# EAGLE board Motor-Controllers (EAGLE 8.5.0)
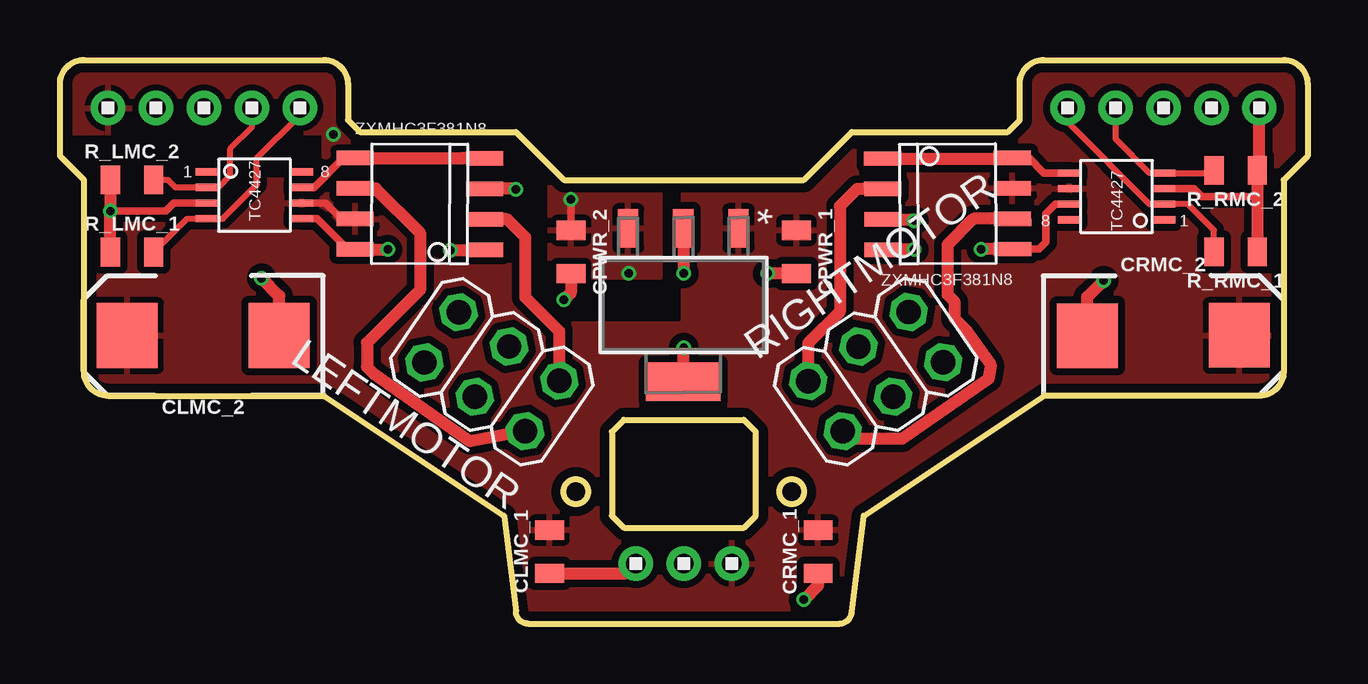
[diagram p0: board, top side]
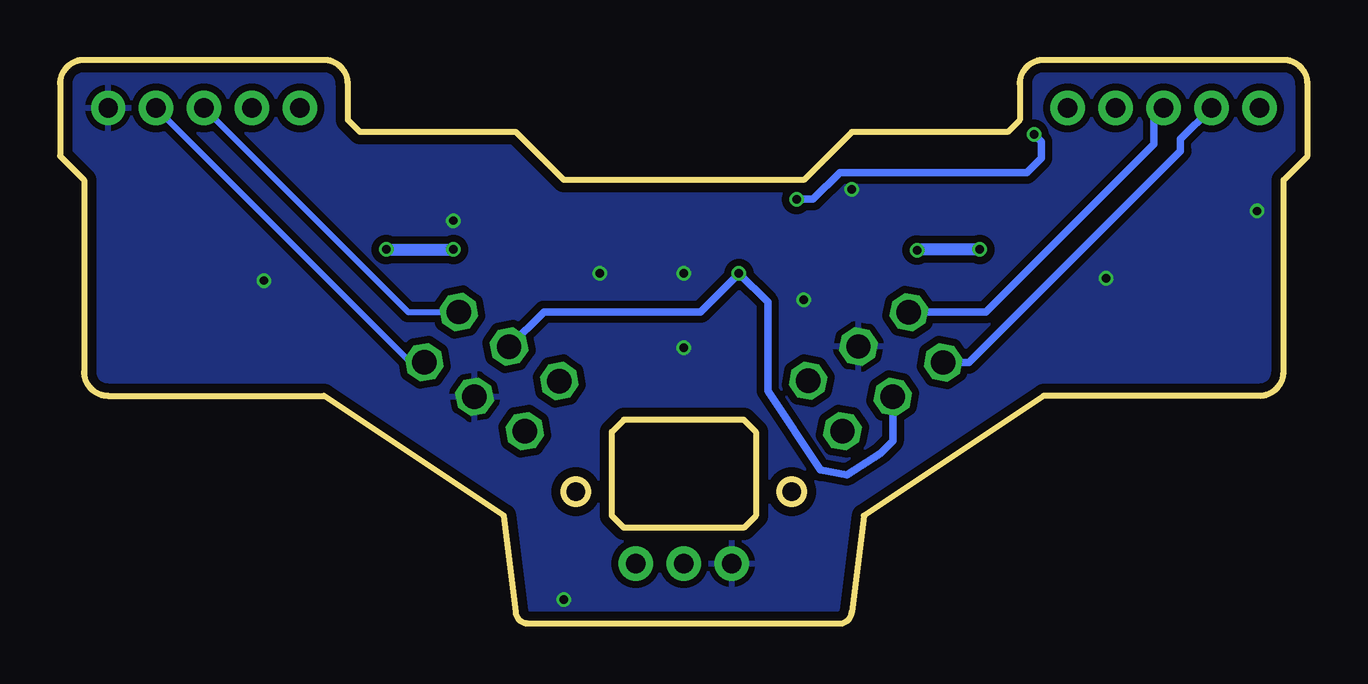
[diagram p1: board, bottom side, seen from below]

Size 52 x 23.5 mm. Coordinates in mm from the lower left corner, seen from the top.
Outline: 33.5,4.5 41,9.5 50,9.5 arc90 51,10.5 51,18.5 52,19.5 52,22.5 arc90 51,23.5 41,23.5 arc90 40,22.5 40,21 39.5,20.5 33,20.5 31,18.5 21,18.5 19,20.5 12.5,20.5 12,21 12,22.5 arc90 11,23.5 1,23.5 arc90 0,22.5 0,19.5 1,18.5 1,10.5 arc90 2,9.5 11,9.5 18.5,4.5 19,0.5 arc90 19.5,0 32.5,0 arc90 33,0.5 33.5,4.5
Outline: 23.5,8.5 28.5,8.5 29,8 29,4.5 28.5,4 23.5,4 23,4.5 23,8 23.5,8.5
Outline: circle at 21.5,5.5 radius 0.5
Outline: circle at 30.5,5.5 radius 0.5
Copper layers (1*16): Top 0.035559375mm / dielectric 1.6mm / Bottom 0.035559375mm
Design rules "oshpark-2layer *": minimum track width 6mil, minimum drill 10mil, track to track 6mil, track to pad 6mil, pad to pad 6mil, via to via 6mil, smd to smd 6mil, copper to edge 15mil, drill to drill 6mil, minimum pad ring 5mil, minimum via ring 5mil, stop-mask expansion 2.5mil, vias tented up to drill 12mil, thermal gap 10mil

## Footprints (pad centres in the part's own frame; a part is rotated, then mirrored left to right if it is on the bottom)
1X1 = drill 0.8 pad 1.422: 1 0,0
0805 = smd 0.8 x 1.2: 1 -0.9,0; 2 0.9,0
EIA7343 = smd 2.55 x 2.7: A 3.17,0; C -3.17,0
2X03 = drill 1.016 octagon: 1 -2.54,-1.27; 2 -2.54,1.27; 3 0,-1.27; 4 0,1.27; 5 2.54,-1.27; 6 2.54,1.27
1X4 = drill 0.8 pad 1.422: 1 -3,0; 2 -1,0; 3 1,0; 4 3,0
1X3 = drill 0.8 pad 1.422: 1 -2,0; 2 0,0; 3 2,0
MP04A = smd 1.6 x 0.838: 1 -3.2,2.3; 2 -3.2,0; 3 -3.2,-2.3 | smd 1.6 x 3.099: 4 3.2,0
TC4427(8MSOP) = smd 0.95 x 0.3: GND -1.975,-0.325; IN_A -1.975,0.325; IN_B -1.975,-0.975; NC1 -1.975,0.975; NC2 1.975,0.975; OUT_A 1.975,0.325; OUT_B 1.975,-0.975; VDD 1.975,-0.325
ZXMHC3F381N8 = smd 0.6 x 1.55: N1D/P1D -0.635,-2.7; N1G -1.905,-2.7; N1S/N2S 0.635,-2.7; N2D/P2D 0.635,2.7; N2G 1.905,-2.7; P1G -1.905,2.7; P1S/P2S -0.635,2.7; P2G 1.905,2.7

## Placement (x,y rotation side)
5V  1X1  [1X1]  2,21.5 0 top
CLMC_1  0.33µF  [0805]  20.4,3 90 top
CLMC_2  100uF  [EIA7343]  5.97,12.01 180 top
CPWR_1  0.47µF  [0805]  30.7,15.5 270 top
CPWR_2  22µF  [0805]  21.3,15.5 270 top
CRMC_1  0.33µF  [0805]  31.6,3 90 top
CRMC_2  100uF  [EIA7343]  45.99,12.01 0.1 top
GND  1X1  [1X1]  49.99,21.5 0 top
LEFTMOTOR  [2X03]  18,10.5 145.7 top
LM  1X4  [1X4]  7,21.5 0 top
PW  1X3  [1X3]  26,2.5 180 top
R_LMC_1  0.75  [0805]  3,15.49 0 top
R_LMC_2  0.75  [0805]  3,18.5 0 top
R_RMC_1  0.75  [0805]  49,15.5 180 top
R_RMC_2  0.75  [0805]  49,18.9 180 top
REG1  LM2940IMP-5.0/NOPB  [MP04A]  25.98,13.28 270 top
RIGHTMOTOR  [2X03]  34,10.5 34.5 top
RM  1X4  [1X4]  45,21.5 0 top
U$15  TC4427(8MSOP)  [TC4427(8MSOP)]  8.11,17.86 0 top
U$16  ZXMHC3F381N8  [ZXMHC3F381N8]  15,17.5 89.9 top
U$17  TC4427(8MSOP)  [TC4427(8MSOP)]  44.04,17.81 180 top
U$18  ZXMHC3F381N8  [ZXMHC3F381N8]  37,17.5 270.3 top

## Library data of the parts
5V GND LM PW RM = headers(2mm)
CLMC_1 CPWR_1 CPWR_2 CRMC_1 = SparkFun-Capacitors; PROD_ID: CAP-08469
CLMC_2 CRMC_2 = SparkFun-Capacitors; PROD_ID: CAP-07890
LEFTMOTOR RIGHTMOTOR = pinhead
R_LMC_1 R_LMC_2 R_RMC_1 R_RMC_2 = SparkFun-Resistors; PROD_ID: RES-08474
REG1 = LM2940IMP-5.0; 3D_LIBRARY_NAME: National_LDO; BASE_PN: LM2940; COMP: TypeLDO; COPYRIGHT: Copyright C 2015 Accelerated Designs. All rights reserved; LIBRARY: ReferenceLM2940IMP; MANUFACTURER_PART_NUMBER: LM2940IMP5.0NOPB; PIN: Count4; SYMBOL: NameLM2940IMP50; TYPE: LM2940IMP5.0; VENDOR: National Semiconductor; VERSION: 1
U$15 U$17 = TC4427(8MSOP)
U$16 U$18 = ZXMHC3F381N8

## Nets
5V: 5V.1 CPWR_2.1 LEFTMOTOR.4 REG1.3 RIGHTMOTOR.4
GND: CLMC_1.1 CLMC_2.C CPWR_1.2 CPWR_2.2 CRMC_1.1 CRMC_2.C GND.1 LEFTMOTOR.3 PW.3 R_LMC_1.1 R_LMC_2.1 R_RMC_1.1 R_RMC_2.1 REG1.2 REG1.4 RIGHTMOTOR.3 U$15.GND U$16.N1S/N2S U$17.GND U$18.N1S/N2S
L: LEFTMOTOR.1 U$16.N1D/P1D
LENCA: LEFTMOTOR.6 LM.1
LENCB: LEFTMOTOR.5 LM.2
LPWMA: LM.4 R_LMC_1.2 U$15.IN_B
LPWMB: LM.3 R_LMC_2.2 U$15.IN_A
N$28: LEFTMOTOR.2 U$16.N2D/P2D
N$33: U$17.OUT_A U$18.N2G U$18.P2G
N$34: U$17.OUT_B U$18.N1G U$18.P1G
N$36: RIGHTMOTOR.1 U$18.N2D/P2D
OUT_A: U$15.OUT_B U$16.N1G U$16.P1G
OUT_B: U$15.OUT_A U$16.N2G U$16.P2G
R: RIGHTMOTOR.2 U$18.N1D/P1D
RENCA: RIGHTMOTOR.6 RM.3
RENCB: RIGHTMOTOR.5 RM.4
RPWMA: R_RMC_1.2 RM.1 U$17.IN_A
RPWMB: R_RMC_2.2 RM.2 U$17.IN_B
VBAT: CLMC_1.2 CLMC_2.A CPWR_1.1 CRMC_1.2 CRMC_2.A PW.1 REG1.1 U$15.VDD U$16.P1S/P2S U$17.VDD U$18.P1S/P2S

## Tracks (layer width: path | path; a pad name or v marks a point on that pad's centre or on a via)
5V  (via drill 0.35)
  Top 0.305: CPWR_2.1 v21.3,17.69
  Bottom 0.254: LEFTMOTOR.4
  Bottom 0.305: LEFTMOTOR.4 17.29,7.61 17.8,7.1 19.2,6.2 20.3,6.4 22.5,9.7 22.5,13.4 v23.7,14.6 25.3,13 31.83,13 RIGHTMOTOR.4 | RIGHTMOTOR.4 | v21.3,17.69 20.61,17.69 19.5,18.8 11.7,18.8 11.1,19.4 11.1,20.1 v11.4,20.4
  pour Top (isolate 0.254): 20.42,18.47 20.42,14.55 20.46,14.51 20.51,14.46 25.02,14.46 25.02,24.48 25,24.5 0,24.5 0,20.5 11,20.5 11,19.5 20,19.5 20.42,19.08 20.42,18.48
GND  (via drill 0.35)
  Top 0.305: U$15.GND 4.73,17.54 4.4,17.2 v2.1,17.2 | U$17.GND 47.27,18.14 47.6,17.8 49.9,17.8
  Top 0.508: R_LMC_2.1 v2.1,17.2 R_LMC_1.1 | CRMC_2.C 42.82,13.62 v43.5,14.3 | GND.1 49.99,18.99 R_RMC_2.1 49.9,17.8 R_RMC_1.1 | CLMC_1.1 23.6,2.1 PW.3 | CPWR_2.2 21.3,13.8 v21,13.5 | 18.97,18.13 v19,18.1 18.97,18.13 | U$18.N1S/N2S 35.55,16.85 v35.6,16.8 | CPWR_1.2 v29.5,14.6 | REG1.2 25.98,14.62 v26,14.6 | 18.17,18.13 18.2,18.1 | REG1.4 25.98,11.48 v26,11.5 | CLMC_2.C 9.14,13.66 v8.4,14.4 | 18.97,18.13 U$16.N1S/N2S 18.17,18.13 | 18.17,18.13 | CRMC_1.1 31.6,1.6 v31,1
  pour Bottom (isolate 0.305): -7,28.5 -7,-2.5 60,-2.5 60,28.5
L
  Top 0.508: U$16.N1D/P1D 18.64,16.86 19.4,16.1 19.4,13.6 20.82,12.18 LEFTMOTOR.1
LENCA
  Bottom 0.305: LM.1 5.3,20.2 5.3,19.7 14.12,10.89 LEFTMOTOR.6
LENCB
  Bottom 0.254: LEFTMOTOR.5
  Bottom 0.305: LM.2 6.4,21.1 6.4,20 13.42,12.98 LEFTMOTOR.5
LPWMA
  Top 0.254: R_LMC_1.2 5.3,16.89 U$15.IN_B 6.78,16.89 8.2,18.3 8.2,19.4 10,21.2 LM.4
LPWMB
  Top 0.254: R_LMC_2.2 4.5,18.5 4.81,18.18 U$15.IN_A 6.59,18.18 7.1,18.7 7.1,19.8 8,20.7 LM.3
N$28
  Top 0.254: LEFTMOTOR.2
  Top 0.508: U$16.N2D/P2D 13.16,18.14 15,16.3 15,13.9 12.8,11.7 12.8,10.7 13.1,10.4 17.1,7.6 LEFTMOTOR.2 | U$16.N2D/P2D
N$33  (via drill 0.35)
  Top 0.305: U$17.OUT_A 41.48,17.48 41.1,17.1 41.1,15.9 40.81,15.61 U$18.P2G
  Top 0.508: U$18.P2G v38.41,15.61 v38.4,15.6 | v35.6,15.6 34.33,15.6 U$18.N2G
  Bottom 0.508: v38.4,15.6 v35.6,15.6
N$34
  Top 0.305: U$17.OUT_B 41.02,18.79 40.38,19.42 U$18.P1G
  Top 0.508: U$18.N1G 39.66,19.39 U$18.P1G
N$36
  Top 0.508: U$18.N2D/P2D 38.08,16.88 37,15.8 37,13.7 37.3,13.4 37.3,12.7 37.8,12.2 38.8,10.8 38.7,10.2 35.1,7.7 32.95,7.7 RIGHTMOTOR.1 | RIGHTMOTOR.1
OUT_A  (via drill 0.35)
  Top 0.305: U$15.OUT_B 10.72,16.89 12,15.6 U$16.P1G
  Top 0.508: U$16.P1G v13.66,15.6 | v16.27,15.57 17.67,15.57 U$16.N1G | U$16.P1G
  Bottom 0.508: v13.66,15.6 16.24,15.6 v16.27,15.57
OUT_B
  Top 0.254: U$16.N2G
  Top 0.305: U$15.OUT_A 10.59,18.18 11.81,19.41 U$16.P2G | U$16.P2G
  Top 0.508: U$16.P2G 16.8,19.41 16.81,19.4 U$16.N2G
R
  Top 0.508: U$18.N1D/P1D 33.22,18.12 32.5,17.4 32.5,13 31.19,11.69 RIGHTMOTOR.2 | RIGHTMOTOR.2
RENCA
  Bottom 0.254: RM.3 37.49,12.99 RIGHTMOTOR.6 | RIGHTMOTOR.6
RENCB
  Bottom 0.254: RM.4 37.39,10.89 RIGHTMOTOR.5
RPWMA
  Top 0.254: R_RMC_1.2 48.1,16.4 47.02,17.48 U$17.IN_A 45.42,17.48 42,20.9 RM.1
RPWMB
  Top 0.254: RM.2 44,20.2 45.42,18.79 U$17.IN_B 47.98,18.79 R_RMC_2.2
VBAT
  Top 0.305: U$15.VDD 11.06,17.54 11.73,16.87 U$16.P1S/P2S
  pour Top (isolate 0.305): 20,12.5 26,12.5 26,23.5 57,23.5 58,22.5 58,2.5 54,-1.5 0,-1.5 -3,1.5 -3.1,18.5 20,18.5